# EAGLE board CT_schematic (EAGLE 7.6.0)

Size 100 x 80 mm. Coordinates in mm from the lower left corner, seen from the top.
Outline: 0,0 100,0 100,80 0,80 0,0
Copper layers (1*16): Top 0.035mm / dielectric 1.5mm / Bottom 0.035mm
Design rules "default": minimum track width 10mil, minimum drill 24mil, track to track 8mil, track to pad 8mil, pad to pad 8mil, via to via 8mil, smd to smd 8mil, copper to edge 40mil, drill to drill 8mil, minimum pad ring 10mil, minimum via ring 8mil, stop-mask expansion 4mil, vias tented up to drill 0mil, thermal gap 10mil

## Footprints (pad centres in the part's own frame; a part is rotated, then mirrored left to right if it is on the bottom)
C0603 = smd 0.8 x 0.8: 1 -0.762,0; 2 0.762,0
C0402 = smd 0.5 x 0.5: 1 -0.508,0; 2 0.508,0
C1206 = smd 1.3 x 1.6: 1 -1.524,0; 2 1.524,0
C1210 = smd 1.2 x 2.5: 1 -1.524,0; 2 1.524,0
EXV-9H = smd 3.505 x 1.676: 1 -2.857,0; 2 2.857,0
L0603 = smd 0.8 x 0.8: 1 -0.762,0; 2 0.762,0
PJ-037B_PACKAGE = drill 3.7 square: 1 12,0 | drill 3.2 square: 2 6,0
R0603 = smd 0.8 x 0.8: 1 -0.762,0; 2 0.762,0
LQFP64 = smd 0.3 x 1.2: 1 -3.75,-5.75; 2 -3.25,-5.75; 3 -2.75,-5.75; 4 -2.25,-5.75; 5 -1.75,-5.75; 6 -1.25,-5.75; 7 -0.75,-5.75; 8 -0.25,-5.75; 9 0.25,-5.75; 10 0.75,-5.75; 11 1.25,-5.75; 12 1.75,-5.75; 13 2.25,-5.75; 14 2.75,-5.75; 15 3.25,-5.75; 16 3.75,-5.75; 33 3.75,5.75; 34 3.25,5.75; 35 2.75,5.75; 36 2.25,5.75; 37 1.75,5.75; 38 1.25,5.75; 39 0.75,5.75; 40 0.25,5.75; 41 -0.25,5.75; 42 -0.75,5.75; 43 -1.25,5.75; 44 -1.75,5.75; 45 -2.25,5.75; 46 -2.75,5.75; 47 -3.25,5.75; 48 -3.75,5.75 | smd 1.2 x 0.3: 17 5.75,-3.75; 18 5.75,-3.25; 19 5.75,-2.75; 20 5.75,-2.25; 21 5.75,-1.75; 22 5.75,-1.25; 23 5.75,-0.75; 24 5.75,-0.25; 25 5.75,0.25; 26 5.75,0.75; 27 5.75,1.25; 28 5.75,1.75; 29 5.75,2.25; 30 5.75,2.75; 31 5.75,3.25; 32 5.75,3.75; 49 -5.75,3.75; 50 -5.75,3.25; 51 -5.75,2.75; 52 -5.75,2.25; 53 -5.75,1.75; 54 -5.75,1.25; 55 -5.75,0.75; 56 -5.75,0.25; 57 -5.75,-0.25; 58 -5.75,-0.75; 59 -5.75,-1.25; 60 -5.75,-1.75; 61 -5.75,-2.25; 62 -5.75,-2.75; 63 -5.75,-3.25; 64 -5.75,-3.75
SOIC-8 = smd 1.6 x 0.6: 1 -2.7,1.905 | smd 1.55 x 0.6: 2 -2.7,0.635; 3 -2.7,-0.635; 4 -2.7,-1.905; 5 2.7,-1.905; 6 2.7,-0.635; 7 2.7,0.635; 8 2.7,1.905
TFBGA-153 = smd 0.3 x 0.3: A1 -3.25,3.25; A2 -2.75,3.25; A3 -2.25,3.25; A4 -1.75,3.25; A5 -1.25,3.25; A6 -0.75,3.25; A7 -0.25,3.25; A8 0.25,3.25; A9 0.75,3.25; A10 1.25,3.25; A11 1.75,3.25; A12 2.25,3.25; A13 2.75,3.25; A14 3.25,3.25; B1 -3.25,2.75; B2 -2.75,2.75; B3 -2.25,2.75; B4 -1.75,2.75; B5 -1.25,2.75; B6 -0.75,2.75; B7 -0.25,2.75; B8 0.25,2.75; B9 0.75,2.75; B10 1.25,2.75; B11 1.75,2.75; B12 2.25,2.75; B13 2.75,2.75; B14 3.25,2.75; C1 -3.25,2.25; C2 -2.75,2.25; C3 -2.25,2.25; C4 -1.75,2.25; C5 -1.25,2.25; C6 -0.75,2.25; C7 -0.25,2.25; C8 0.25,2.25; C9 0.75,2.25; C10 1.25,2.25; C11 1.75,2.25; C12 2.25,2.25; C13 2.75,2.25; C14 3.25,2.25; D1 -3.25,1.75; D2 -2.75,1.75; D3 -2.25,1.75; D4 -1.75,1.75; D12 2.25,1.75; D13 2.75,1.75; D14 3.25,1.75; E1 -3.25,1.25; E2 -2.75,1.25; E3 -2.25,1.25; E5 -1.25,1.25; E6 -0.75,1.25; E7 -0.25,1.25; E8 0.25,1.25; E9 0.75,1.25; E10 1.25,1.25; E12 2.25,1.25; E13 2.75,1.25; E14 3.25,1.25; F1 -3.25,0.75; F2 -2.75,0.75; F3 -2.25,0.75; F5 -1.25,0.75; F10 1.25,0.75; F12 2.25,0.75; F13 2.75,0.75; F14 3.25,0.75; G1 -3.25,0.25; G2 -2.75,0.25; G3 -2.25,0.25; G5 -1.25,0.25; G10 1.25,0.25; G12 2.25,0.25; G13 2.75,0.25; G14 3.25,0.25; H1 -3.25,-0.25; H2 -2.75,-0.25; H3 -2.25,-0.25; H5 -1.25,-0.25; H10 1.25,-0.25; H12 2.25,-0.25; H13 2.75,-0.25; H14 3.25,-0.25; J1 -3.25,-0.75; J2 -2.75,-0.75; J3 -2.25,-0.75; J5 -1.25,-0.75; J10 1.25,-0.75; J12 2.25,-0.75; J13 2.75,-0.75; J14 3.25,-0.75; K1 -3.25,-1.25; K2 -2.75,-1.25; K3 -2.25,-1.25; K5 -1.25,-1.25; K6 -0.75,-1.25; K7 -0.25,-1.25; K8 0.25,-1.25; K9 0.75,-1.25; K10 1.25,-1.25; K12 2.25,-1.25; K13 2.75,-1.25; K14 3.25,-1.25; L1 -3.25,-1.75; L2 -2.75,-1.75; L3 -2.25,-1.75; L12 2.25,-1.75; L13 2.75,-1.75; L14 3.25,-1.75; M1 -3.25,-2.25; M2 -2.75,-2.25; M3 -2.25,-2.25; M4 -1.75,-2.25; M5 -1.25,-2.25; M6 -0.75,-2.25; M7 -0.25,-2.25; M8 0.25,-2.25; M9 0.75,-2.25; M10 1.25,-2.25; M11 1.75,-2.25; M12 2.25,-2.25; M13 2.75,-2.25; M14 3.25,-2.25; N1 -3.25,-2.75; N2 -2.75,-2.75; N3 -2.25,-2.75; N4 -1.75,-2.75; N5 -1.25,-2.75; N6 -0.75,-2.75; N7 -0.25,-2.75; N8 0.25,-2.75; N9 0.75,-2.75; N10 1.25,-2.75; N11 1.75,-2.75; N12 2.25,-2.75; N13 2.75,-2.75; N14 3.25,-2.75; P1 -3.25,-3.25; P2 -2.75,-3.25; P3 -2.25,-3.25; P4 -1.75,-3.25; P5 -1.25,-3.25; P6 -0.75,-3.25; P7 -0.25,-3.25; P8 0.25,-3.25; P9 0.75,-3.25; P10 1.25,-3.25; P11 1.75,-3.25; P12 2.25,-3.25; P13 2.75,-3.25; P14 3.25,-3.25
ABLS-25.000MHZ-B2F-T = smd 5.6 x 2.8: 1 -3.81,0; 2 5.69,0
ASEK = smd 1.4 x 1: 1 -1.1,-0.8; 2 1.1,-0.8; 3 1.1,0.8; 4 -1.1,0.8
WSON-8 = smd 0.3 x 0.6: 1 -0.75,0; 2 0.05,0; 3 0.85,0; 4 1.65,0; 5 1.65,3.8; 6 0.85,3.8; 7 0.05,3.8; 8 -0.75,3.8 | smd 3 x 2.6: PAD 0.45,1.9
SON-6 = smd 0.55 x 0.3: 1 -0.355,0.5 | smd 0.52 x 0.3: 2 -0.37,0; 3 -0.37,-0.5; 4 0.37,-0.5; 5 0.37,0; 6 0.37,0.5
SW_4-1437565-2 = smd 1.4 x 2.1: 1 -2.23,4.55; 2 -2.23,-4.55; 3 2.23,4.55; 4 2.23,-4.55
LGM67K-G1J2-24-Z = smd 0.8 x 1.4: A -2,0; C 0,0
NC7SZ125M5X = smd 1.3 x 0.7: 1 -1.3,0.95; 2 -1.3,0; 3 -1.3,-0.95; 4 1.3,-0.95; 5 1.3,0.95
DUMMY_PACKAGE_153 = drill 0.3: 1 0,-1; 2 1.5,-1; 3 3,-1

## Placement (x,y rotation side)
C1  1e-06  [C0603]  -30.48,60.96 0 top  (outside the outline)
C2  1e-07  [C0603]  -34.29,60.96 0 top  (outside the outline)
C3  1e-07  [C0603]  -38.1,60.96 0 top  (outside the outline)
C4  1e-07  [C0603]  -41.91,60.96 0 top  (outside the outline)
C5  1e-07  [C0603]  -45.72,60.96 0 top  (outside the outline)
C6  1e-07  [C0603]  -49.53,60.96 0 top  (outside the outline)
C7  4.7e-06  [C0603]  -15.24,60.96 0 top  (outside the outline)
C8  1e-08  [C0603]  -53.34,60.96 0 top  (outside the outline)
C9  1e-06  [C0603]  -57.15,60.96 0 top  (outside the outline)
C10  1e-11  [C0402]  -45.72,66.04 0 top  (outside the outline)
C11  1e-11  [C0402]  -49.53,66.04 0 top  (outside the outline)
C12  1e-08  [C0402]  -53.34,66.04 0 top  (outside the outline)
C13  1e-07  [C0402]  -57.15,66.04 0 top  (outside the outline)
C14  2.2e-06  [C0603]  -19.05,60.96 0 top  (outside the outline)
C15  2.2e-06  [C0603]  -22.86,60.96 0 top  (outside the outline)
C16  1e-07  [C0402]  -60.96,66.04 0 top  (outside the outline)
C17  1e-07  [C0402]  -64.77,66.04 0 top  (outside the outline)
C18  2.2e-06  [C0603]  -26.67,60.96 0 top  (outside the outline)
C19  1e-08  [C0402]  -15.24,71.12 0 top  (outside the outline)
C20  1e-08  [C0402]  -19.05,71.12 0 top  (outside the outline)
C21  1e-05  [C1206]  -16.51,49.53 0 top  (outside the outline)
C22  1e-05  [C1210]  -59.69,43.18 0 top  (outside the outline)
C23  1e-07  [C0402]  -22.86,71.12 0 top  (outside the outline)
C24  0.0001  [EXV-9H]  -58.42,34.29 0 top  (outside the outline)
C25  0.0001  [EXV-9H]  -17.78,43.18 0 top  (outside the outline)
C26  1e-08  [C0402]  -26.67,71.12 0 top  (outside the outline)
C27  1e-08  [C0402]  -30.48,71.12 0 top  (outside the outline)
F1  240.0  [L0603]  -60.96,60.96 0 top  (outside the outline)
J1  PJ-037B  [PJ-037B_PACKAGE]  -41.91,7.62 0 top  (outside the outline)
R1  10000.0  [R0603]  -49.53,49.53 0 top  (outside the outline)
R2  1000.0  [R0603]  -64.77,60.96 0 top  (outside the outline)
R3  1600.5  [R0603]  -15.24,66.04 0 top  (outside the outline)
R4  4700.0  [R0603]  -19.05,66.04 0 top  (outside the outline)
R5  4700.0  [R0603]  -22.86,66.04 0 top  (outside the outline)
R6  2200.0  [R0603]  -26.67,66.04 0 top  (outside the outline)
R7  2200.0  [R0603]  -30.48,66.04 0 top  (outside the outline)
R8  10000.0  [R0603]  -54.61,49.53 0 top  (outside the outline)
R9  10000.0  [R0603]  -59.69,49.53 0 top  (outside the outline)
R10  34000.0  [R0603]  -64.77,49.53 0 top  (outside the outline)
R11  34000.0  [R0603]  -15.24,55.88 0 top  (outside the outline)
R12  34000.0  [R0603]  -20.32,55.88 0 top  (outside the outline)
R13  34000.0  [R0603]  -25.4,55.88 0 top  (outside the outline)
R14  34000.0  [R0603]  -30.48,55.88 0 top  (outside the outline)
R15  34000.0  [R0603]  -35.56,55.88 0 top  (outside the outline)
R16  34000.0  [R0603]  -40.64,55.88 0 top  (outside the outline)
R17  34000.0  [R0603]  -45.72,55.88 0 top  (outside the outline)
R18  34000.0  [R0603]  -50.8,55.88 0 top  (outside the outline)
R19  34000.0  [R0603]  -55.88,55.88 0 top  (outside the outline)
R20  100000.0  [R0603]  -34.29,49.53 0 top  (outside the outline)
R21  2231.0  [R0603]  -34.29,66.04 0 top  (outside the outline)
R22  1000.0  [R0603]  -38.1,66.04 0 top  (outside the outline)
R23  10000.0  [R0603]  -60.96,55.88 0 top  (outside the outline)
R24  10000.0  [R0603]  -66.04,55.88 0 top  (outside the outline)
R25  9100.0  [R0603]  -41.91,66.04 0 top  (outside the outline)
R26  680000.0  [R0603]  -39.37,49.53 0 top  (outside the outline)
R27  120000.0  [R0603]  -44.45,49.53 0 top  (outside the outline)
U1  stm32f103rgt7  [LQFP64]  -53.34,7.62 0 top  (outside the outline)
U2  M24M02-DRMN6TP  [SOIC-8]  -44.45,22.86 0 top  (outside the outline)
U3  mtfc4gmcdm  [TFBGA-153]  -20.32,8.89 0 top  (outside the outline)
U4  ABLS-25.000MHZ-B2F-T  [ABLS-25.000MHZ-B2F-T]  -36.83,43.18 0 top  (outside the outline)
U5  ASEK-32.768KHz-ECST  [ASEK]  -49.53,34.29 0 top  (outside the outline)
U6  LP3878SDX-ADJ/NOPB  [WSON-8]  -30.48,33.02 0 top  (outside the outline)
U7  TPS3895ADRYR  [SON-6]  -39.37,69.85 0 top  (outside the outline)
U8  4-1437565-2  [SW_4-1437565-2]  -27.94,24.13 0 top  (outside the outline)
U9  Q65110A2395  [LGM67K-G1J2-24-Z]  -48.26,43.18 0 top  (outside the outline)
U10  nc7sz125m5x  [NC7SZ125M5X]  -21.59,49.53 0 top  (outside the outline)
U11  nc7sz125m5x  [NC7SZ125M5X]  -27.94,49.53 0 top  (outside the outline)
U12  Dummy  [DUMMY_PACKAGE_153]  -36.83,71.12 0 top  (outside the outline)

## Library data of the parts
C1-C27 F1 J1 R1-R27 U1-U12 = circuit_tree

## Nets
CLK_CRYSTAL_U1_5: C10.1 U1.5 U4.1
CLK_CRYSTAL_U1_6: C11.1 U1.6 U4.2
CLK_U1_3: U1.3 U5.3
GND: C1.2 C2.2 C3.2 C4.2 C5.2 C6.2 C7.2 C8.2 C9.2 C10.2 C11.2 C12.2 C13.2 C14.2 C15.2 C16.2 C17.2 C18.2 C19.2 C20.2 C21.2 C22.2 C23.2 C24.2 C25.2 C26.2 C27.2 J1.2 R2.2 R8.2 R9.2 R22.2 R25.2 R27.2 U1.12 U1.18 U1.31 U1.47 U1.63 U2.4 U3.C4 U3.E7 U3.G5 U3.H10 U3.K8 U3.N2 U3.N5 U3.P4 U3.P6 U5.2 U6.3 U6.PAD U7.2 U9.C U10.1 U10.3 U11.1 U11.3 U12.1
NET_U1_7: R5.1 U1.7 U11.4
NET_U1_13: C8.1 C9.1 F1.1 U1.13
NET_U1_56: R3.1 U1.56 U9.A
NET_U1_57: R1.1 U1.57 U8.3 U8.4
NET_U1_58: R6.1 U1.58 U2.6
NET_U1_59: R7.1 U1.59 U2.5
NET_U1_60: R8.1 U1.60
NET_U2_3: R9.1 U2.3
NET_U3_C2: C15.1 C16.1 U3.C2
NET_U3_K5: R4.1 U3.K5 U10.4
NET_U6_1: C20.1 U6.1
NET_U6_6: R21.2 R22.1 U6.6
NET_U6_8: R20.1 U6.8
NET_U7_1: R24.1 R25.1 U7.1
NET_U7_3: R26.2 R27.1 U7.3
NET_U7_4: R23.1 U7.4 U10.2 U11.2
NET_U8_1: R2.1 U8.1 U8.2
PROC_SDIO_CK: R19.1 U1.53 U3.M6
PROC_SDIO_CMD: R18.1 U1.54 U3.M5
PROC_SDIO_D0: R10.1 U1.39 U3.A3
PROC_SDIO_D1: R11.1 U1.40 U3.A4
PROC_SDIO_D2: R12.1 U1.51 U3.A5
PROC_SDIO_D3: R13.1 U1.52 U3.B2
PROC_SDIO_D4: R14.1 U1.61 U3.B3
PROC_SDIO_D5: R15.1 U1.62 U3.B4
PROC_SDIO_D6: R16.1 U1.37 U3.B5
PROC_SDIO_D7: R17.1 U1.38 U3.B6
PROC_TIM1_CH2: U1.42 U12.2
PROC_TIM1_CH4: U1.44 U12.3
VCC_S1_6V1: C21.1 C24.1 C25.1 J1.1 R20.2 U6.4
VCC_TIER1_3V3: C1.1 C2.1 C3.1 C4.1 C5.1 C6.1 C7.1 C12.1 C13.1 C14.1 C17.1 C18.1 C19.1 C22.1 C23.1 C26.1 C27.1 F1.2 R1.2 R3.2 R4.2 R5.2 R6.2 R7.2 R10.2 R11.2 R12.2 R13.2 R14.2 R15.2 R16.2 R17.2 R18.2 R19.2 R21.1 R23.2 R24.2 R26.1 U1.1 U1.19 U1.32 U1.48 U1.64 U2.8 U3.C6 U3.E6 U3.F5 U3.J10 U3.K9 U3.M4 U3.N4 U3.P3 U3.P5 U5.4 U6.5 U7.6 U10.5 U11.5

## Tracks (layer width: path | path; a pad name or v marks a point on that pad's centre or on a via)
CLK_CRYSTAL_U1_5  (2 unrouted)
CLK_CRYSTAL_U1_6  (2 unrouted)
CLK_U1_3  (1 unrouted)
GND  (58 unrouted)
NET_U1_7  (2 unrouted)
NET_U1_13  (3 unrouted)
NET_U1_56  (2 unrouted)
NET_U1_57  (3 unrouted)
NET_U1_58  (2 unrouted)
NET_U1_59  (2 unrouted)
NET_U1_60  (1 unrouted)
NET_U2_3  (1 unrouted)
NET_U3_C2  (2 unrouted)
NET_U3_K5  (2 unrouted)
NET_U6_1  (1 unrouted)
NET_U6_6  (2 unrouted)
NET_U6_8  (1 unrouted)
NET_U7_1  (2 unrouted)
NET_U7_3  (2 unrouted)
NET_U7_4  (3 unrouted)
NET_U8_1  (2 unrouted)
PROC_SDIO_CK  (2 unrouted)
PROC_SDIO_CMD  (2 unrouted)
PROC_SDIO_D0  (2 unrouted)
PROC_SDIO_D1  (2 unrouted)
PROC_SDIO_D2  (2 unrouted)
PROC_SDIO_D3  (2 unrouted)
PROC_SDIO_D4  (2 unrouted)
PROC_SDIO_D5  (2 unrouted)
PROC_SDIO_D6  (2 unrouted)
PROC_SDIO_D7  (2 unrouted)
PROC_TIM1_CH2  (1 unrouted)
PROC_TIM1_CH4  (1 unrouted)
VCC_S1_6V1  (5 unrouted)
VCC_TIER1_3V3  (57 unrouted)